# Altium PCB Copy of back.PcbDoc
Units mil, origin at the board's own origin, x right, y up, seen from the top; angles counter-clockwise.
Board outline 4535 x 3940 mil, 2 copper layers (Top Layer, Bottom Layer); 81 components, 61 nets, 303 pads, 75 vias.
Unrouted connection lines stored in the file: 5.
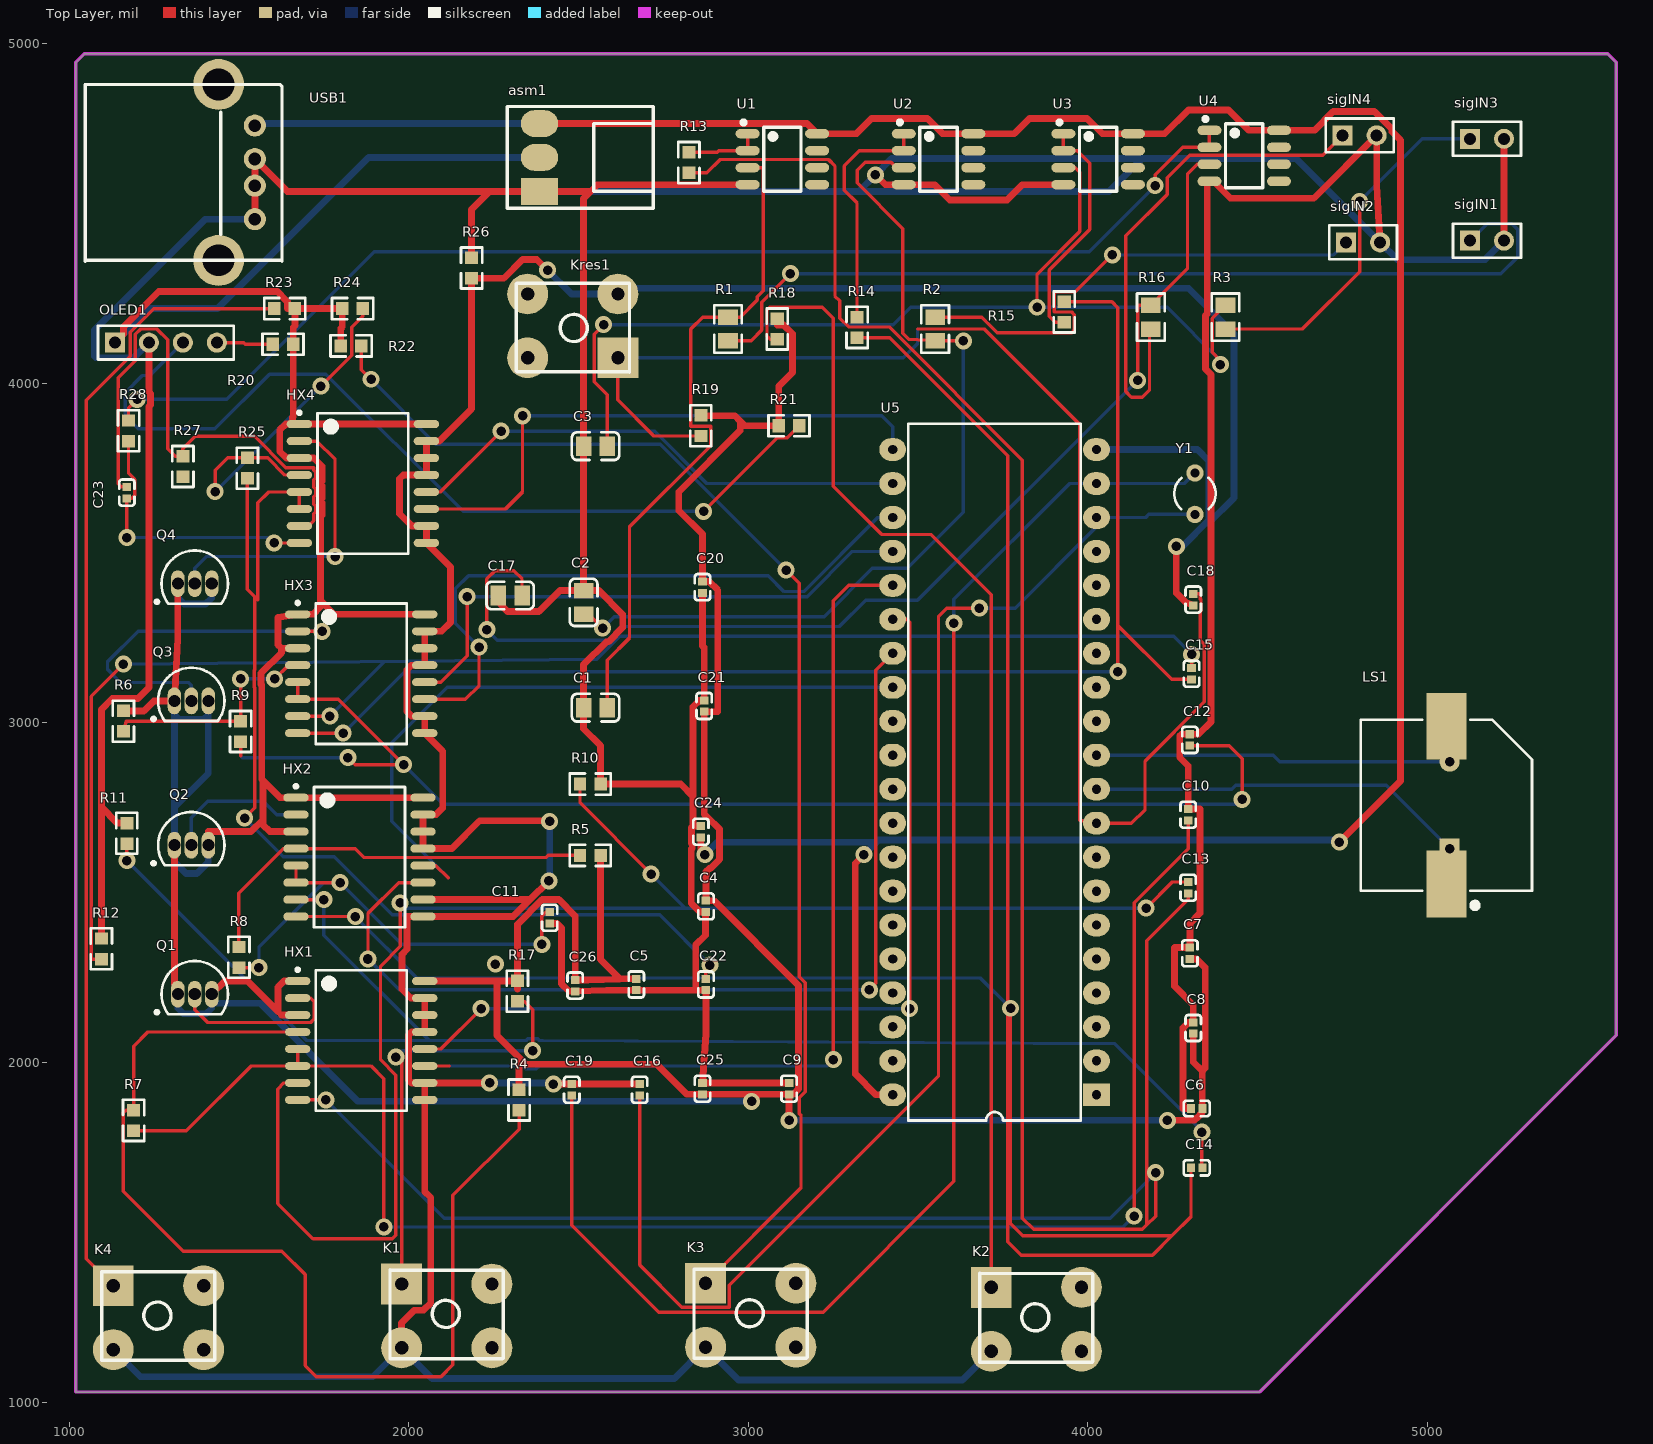
[diagram p0: Top Layer view]
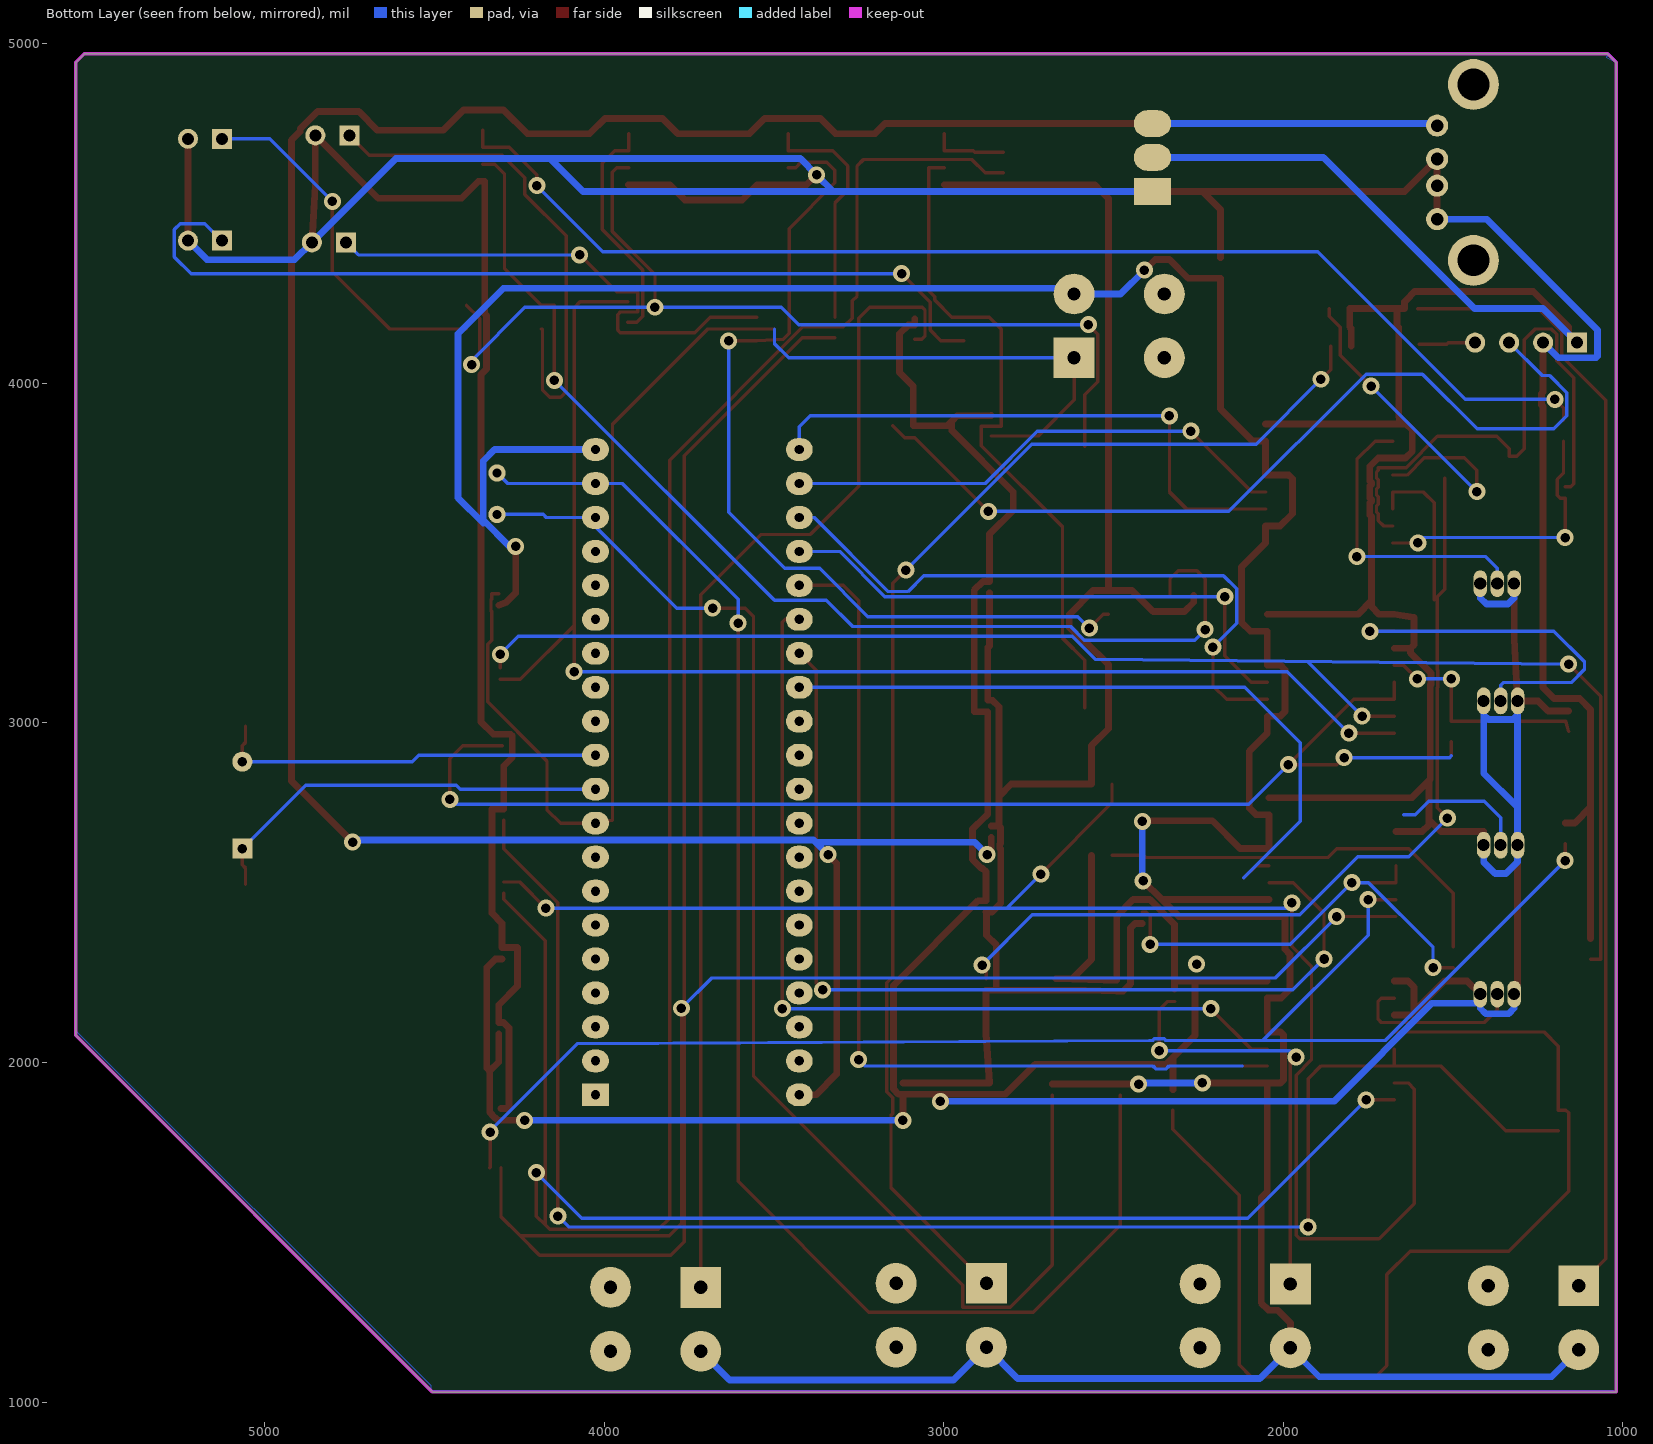
[diagram p1: Bottom Layer view, seen from below]

## Layer stack, top to bottom
Top Solder: solder mask 0.4, Solder Resist, Dk 3.5
Top Layer: signal copper 1.4
Dielectric 1: dielectric 12.6, FR-4, Dk 4.8
Bottom Layer: signal copper 1.4
Bottom Solder: solder mask 0.4, Solder Resist, Dk 3.5

## Board outline
1020,1030 1020,4945 1045,4970 5530,4970 5555,4945 5555,2080 4505,1030

## Design rules (kind name [scope] priority, off if disabled: settings)
Clearance [All] p1: gap=5 ignorepadtopadclearanceinfootprint=TRUE
MinimumSolderMaskSliver [All] p1 off: minsoldermaskwidth=10
PlaneConnect [All] p1: planeconnectstyle=Direct reliefexpansion=20 reliefentries=4 reliefconductorwidth=10 reliefairgap=10
PolygonConnect [All] p1: connectstyle=Direct reliefconductorwidth=10 reliefentries=4 polygonreliefangle="90 Angle" airgapwidth=10
RoutingVias [All] p1: holewidth=28 width=50 viastyle="Through Hole" minholewidth=28 minwidth=50 maxholewidth=28 maxwidth=50
SilkToSilkClearance [All] p1: silktosilkclearance=0
SilkToSolderMaskClearance [IsPad] p1: minsilkscreentomaskgap=0 clearancetoexposedcopper=TRUE
SolderMaskExpansion [All] p1: expansion=4
Width [All] p1: maxlimit=80 minlimit=10 preferedwidth=10 minimp=50.000000 maximp=50.000000 favimp=50.000000
26 further rules are at their usual default settings.

## Components (designator, comment, footprint, x,y, rotation, side; value= is the part's Value field where it differs from the comment)
asm1 "ASM1117" 1117PCB 2645,4565 r180 top
C1 "1uF (105) 10% 50V" 0805_C 2550.04,3045 r0 top
C2 "1uF (105) 10% 50V" 0805_C 2515,3354.96 r270 top
C3 "1uF (105) 10% 50V" 0805_C 2550.04,3815 r0 top
C4 "10uF (106) 20% 6.3V" 0402_C 2875,2460 r90 top
C5 "10uF (106) 20% 6.3V" 0402_C 2670,2230 r90 top
C6 "10uF (106) 20% 6.3V" 0402_C 4320,1865 r0 top
C7 "10uF (106) 20% 6.3V" 0402_C 4300,2321.73 r90 top
C8 "10uF (106) 20% 6.3V" 0402_C 4310,2101.73 r90 top
C9 "10uF (106) 20% 6.3V" 0402_C 3120,1923.27 r90 top
C10 "10uF (106) 20% 6.3V" 0402_C 4295,2730 r270 top
C11 "10uF (106) 20% 6.3V" 0402_C 2415,2426.54 r90 top
C12 "10uF (106) 20% 6.3V" 0402_C 4300,2950 r270 top
C13 "10uF (106) 20% 6.3V" 0402_C 4295,2515 r270 top
C14 "10uF (106) 20% 6.3V" 0402_C 4320,1690 r180 top
C15 "10uF (106) 20% 6.3V" 0402_C 4305,3145 r270 top
C16 "10uF (106) 20% 6.3V" 0402_C 2680,1920 r90 top
C17 "1uF (105) 10% 50V" 0805_C 2298.62,3375.31 r0 top
C18 "10uF (106) 20% 6.3V" 0402_C 4310,3363.27 r90 top
C19 "10uF (106) 20% 6.3V" 0402_C 2480,1920 r90 top
C20 "10uF (106) 20% 6.3V" 0402_C 2865,3400 r90 top
C21 "10uF (106) 20% 6.3V" 0402_C 2870,3050 r90 top
C22 "10uF (106) 20% 6.3V" 0402_C 2875,2230 r90 top
C23 "10uF (106) 20% 6.3V" 0402_C 1170,3678.27 r270 top
C24 "10uF (106) 20% 6.3V" 0402_C 2860,2680 r90 top
C25 "10uF (106) 20% 6.3V" 0402_C 2865,1923.27 r90 top
C26 "10uF (106) 20% 6.3V" 0402_C 2490,2226.73 r270 top
HX1 "hx711" HX711 1860,2065 r0 top
HX2 "hx711" HX711 1855,2605 r0 top
HX3 "hx711" HX711 1860,3145 r0 top
HX4 "hx711" HX711 1865,3705 r0 top
K1 "key" KEYPCB 2019,1365 r0 top
K2 "key" KEYPCB 3755,1355 r0 top
K3 "key" KEYPCB 2914,1367 r0 top
K4 "key" KEYPCB 1170,1360 r0 top
Kres1 "key" KEYPCB 2576,4058 r180 top
LS1 "Buzzer" ABSM-1574 5055.55,2525.67 r90 top
OLED1 "Header 4" HDR1X4 1135,4120 r0 top
Q1 "2N3906" TO-92A 1370,2201.54 r270 top
Q2 "2N3906" TO-92A 1360,2640 r270 top
Q3 "2N3906" TO-92A 1360,3065 r270 top
Q4 "2N3906" TO-92A 1370,3410 r270 top
R1 "15.8k" 0805_R 2940,4160.04 r90 top
R2 "15.8k" 0805_R 3550,4159.96 r270 top
R3 "15.8k" 0805_R 4405,4195 r90 top
R4 "10KΩ (1002) ±1%" 0603_R 2325,1889.68 r90 top
R5 "10KΩ (1002) ±1%" 0603_R 2534.68,2610 r0 top
R6 "10KΩ (1002) ±1%" 0603_R 1160,3005.32 r90 top
R7 "10KΩ (1002) ±1%" 0603_R 1190,1829.68 r90 top
R8 "10KΩ (1002) ±1%" 0603_R 1500,2310 r90 top
R9 "10KΩ (1002) ±1%" 0603_R 1505,2975 r90 top
R10 "1KΩ (1002) ±1%" 0603_R 2534.68,2820 r0 top
R11 "1KΩ (1002) ±1%" 0603_R 1170,2675 r90 top
R12 "1KΩ (1002) ±1%" 0603_R 1095,2335 r90 top
R13 "1KΩ (1002) ±1%" 0603_R 2825,4650 r90 top
R14 "1KΩ (1002) ±1%" 0603_R 3320,4164.68 r90 top
R15 "1KΩ (1002) ±1%" 0603_R 3930,4210 r270 top
R16 "15.8k" 0805_R 4185,4195 r90 top
R17 "10KΩ (1002) ±1%" 0603_R 2320,2210.31 r90 top
R18 "10KΩ (1002) ±1%" 0603_R 3085,4160 r90 top
R19 "10KΩ (1002) ±1%" 0603_R 2860,3875.31 r90 top
R20 "10KΩ (1002) ±1%" 0603_R 1629.69,4115 r180 top
R21 "10KΩ (1002) ±1%" 0603_R 3119.68,3875 r0 top
R22 "10KΩ (1002) ±1%" 0603_R 1830.32,4110 r180 top
R23 "10KΩ (1002) ±1%" 0603_R 1634.68,4220 r0 top
R24 "10KΩ (1002) ±1%" 0603_R 1834.69,4220 r180 top
R25 "10KΩ (1002) ±1%" 0603_R 1525,3750.31 r90 top
R26 "0Ω (0R0) ±1%" 0603_R 2185,4339.68 r90 top
R27 "1KΩ (1002) ±1%" 0603_R 1335,3755 r270 top
R28 "1KΩ (1002) ±1%" 0603_R 1175,3860.31 r90 top
sigIN1 "Header 2" HDR1X2 5125,4420 r0 top
sigIN2 "Header 2" HDR1X2 4760,4415 r0 top
sigIN3 "Header 2" HDR1X2 5125,4720 r0 top
sigIN4 "Header 2" HDR1X2 4750,4730 r0 top
U1 "TL072CDT" SOIC-8_150mil 3100,4660 r270 top
U2 "TL072CDT" SOIC-8_150mil 3560,4660 r270 top
U3 "TL072CDT" SOIC-8_150mil 4030,4660 r270 top
U4 "TL072CDT" SOIC-8_150mil 4460,4670 r270 top
U5 "89c52" DIP40 3725,2855 r90 top
USB1 "USBA" USB-A 1547,4759 r90 top
Y1 "XTAL" R38 4315,3675 r180 top

## Footprints (in the part's own frame and the unit in brackets; to place one, negate y for a bottom-side part, rotate by r counter-clockwise, add the part's x,y. Pads: shape width x height; smd on the part's side, far side on the other; paste and mask are expansions set on the pad)
0402_C [mm]
  rect 0.6x0.65 smd mask+0.051: 1(-0.425,0) 2(0.425,0)
  silkscreen extent -0.98,-0.58 0.98,0.58, body extent -0.48,-0.3 0.52,0.3, height 0.2
0603_R [mm]
  rect 0.93x0.98 smd: 1(-0.77,0) 2(0.77,0)
  silkscreen extent -1.53,-0.79 1.54,0.79, body extent -0.85,-0.4 0.85,0.4, height 0.56
0805_C [mm]
  rect 1.16x1.47 smd: 1(-0.89,0) 2(0.89,0)
  silkscreen extent -1.77,-1.04 1.77,1.04, body extent -1,-0.62 1,0.63, height 0.77
0805_R [mm]
  rect 1.16x1.47 smd: 1(-0.89,0) 2(0.89,0)
  silkscreen extent -1.77,-1.03 1.77,1.03, body extent -1,-0.62 1,0.63, height 0.49
1117PCB [mm]
  rect 2.8x2 all layers, no hole: 1(6.604,0)
  oval 2.8x2 all layers, no hole: 2(6.604,-2.54) 3(6.604,-5.08)
  silkscreen extent -1.91,-6.35 9.02,1.27
ABSM-1574 [mm] "Magnetic Transducer Buzzer"
  rect 5x3 smd: 1(0,0) 2(11.8,0)
  rect 1.5x1.5 hole 0.7: 1A(2.65,-0.24)
  round 1.5 hole 0.7: 2A(9.15,-0.24)
  silkscreen extent -1.83,-6.4 12.3,6.4
DIP40 [mm]
  rect 1.7x2 hole 0.7: 1(-24.13,-7.62)
  oval 1.7x2 hole 0.7: 2(-21.59,-7.62) 3(-19.05,-7.62) 4(-16.51,-7.62) 5(-13.97,-7.62) 6(-11.43,-7.62) 7(-8.89,-7.62) 8(-6.35,-7.62) 9(-3.81,-7.62) 10(-1.27,-7.62) 11(1.27,-7.62) 12(3.81,-7.62) 13(6.35,-7.62) 14(8.89,-7.62) 15(11.43,-7.62) 16(13.97,-7.62) 17(16.51,-7.62) 18(19.05,-7.62) 19(21.59,-7.62) 20(24.13,-7.62) 21(24.13,7.62) 22(21.59,7.62) 23(19.05,7.62) 24(16.51,7.62) 25(13.97,7.62) 26(11.43,7.62) 27(8.89,7.62) 28(6.35,7.62) 29(3.81,7.62) 30(1.27,7.62) 31(-1.27,7.62) 32(-3.81,7.62) 33(-6.35,7.62) 34(-8.89,7.62) 35(-11.43,7.62) 36(-13.97,7.62) 37(-16.51,7.62) 38(-19.05,7.62) 39(-21.59,7.62) 40(-24.13,7.62)
  silkscreen extent -26.05,-6.45 26.05,6.45
HDR1X2 [mm] "Connector; Header; 2 Position"
  rect 1.5x1.5 hole 0.9: 1(0,0)
  round 1.5 hole 0.9: 2(2.54,0)
  silkscreen extent -1.27,-1.27 3.81,1.27
HDR1X4 [mm] "Connector; Header; 4 Position"
  rect 1.5x1.5 hole 0.9: 1(0,0)
  round 1.5 hole 0.9: 2(2.54,0) 3(5.08,0) 4(7.62,0)
  silkscreen extent -1.27,-1.27 8.89,1.27
HX711 [mm] "SOP, 16-Leads, Body 10.30x7.50mm, Pitch 1.27mm, IPC Medium Density"
  oval 1.9x0.6 smd: 1(-4.75,4.445) 2(-4.75,3.175) 3(-4.75,1.905) 4(-4.75,0.635) 5(-4.75,-0.635) 6(-4.75,-1.905) 7(-4.75,-3.175) 8(-4.75,-4.445) 9(4.75,-4.445) 10(4.75,-3.175) 11(4.75,-1.905) 12(4.75,-0.635) 13(4.75,0.635) 14(4.75,1.905) 15(4.75,3.175) 16(4.75,4.445)
  silkscreen extent -4.87,-5.25 3.4,5.42, body extent -3.8,-5.25 3.8,5.25, height 2.65
KEYPCB [mil]
  rect 120x120 hole 39.37: 1(-40,-17)
  round 120 hole 39.37: 2(-40,-205) ""(226,-205) ""(226,-17)
  silkscreen extent -74,-237 259,25
R38 [mm] "Crystal, Thru-Hole; 2 Leads; Body 3.1 x 8.2 mm (Dia.xH)"
  round 1.3 hole 0.7: 1(0,1.55) 2(0,-1.55)
  silkscreen extent -1.55,-1.19 1.55,1.17
SOIC-8_150mil [mm]
  oval 0.7x1.8 smd: 1(-1.905,-2.6) 2(-0.635,-2.6) 3(0.635,-2.6) 4(1.905,-2.6) 5(1.905,2.6) 6(0.635,2.6) 7(-0.635,2.6) 8(-1.905,2.6)
  silkscreen extent -2.9,-3.05 2.4,1.4
TO-92A [mm] "TO, Flat Index; 3 In-Line, Axial Leads; Body Dia. 4.5mm; Leads 0.51 x 0.48 mm (max)"
  oval 2x1 hole 0.9: 1(0,-1.27) 2(0,0) 3(0,1.27)
  silkscreen extent -2.48,-2.95 1.5,2.48, body extent -2.48,-2.5 1.5,2.5, height 6.86
USB-A [mil]
  round 65 hole 37: 1(0,0) 2(-98.5,0) 3(-177,0) 4(-275.6,0)
  round 150 hole 93: 5(121,107) 6(-397,107)
  silkscreen extent -400,-80 121,500

## Part data
asm1: library part 1117
C1 C2 C3 C17: library part "0805 1uF (105) 10% 50V", "贴片电容", Package=0805, SuppliersPartNumber=C28323, ComponentLink1Description=¹©Ó, ComponentLink1URL=http://www.szlcsc.com/product/details_29074.html, Supplier=LC
C4 C5 C6 C7 C8 C9 C10 C11 C12 C13 C14 C15 C16 C18 C19 C20 C21 C22 C23 C24 C25 C26: library part "0402 10uF (106) 20% 6.3V", "贴片电容", Package=0402, SuppliersPartNumber=C15525, ComponentLink1Description=¹©Ó, ComponentLink1URL=http://www.szlcsc.com/product/details_16204.html, Supplier=LC
LS1: "Magnetic Transducer Buzzer", ComponentLink1Description="Manufacturer Link", ComponentLink1URL=http://www.megastar.com/linecard/buzzmode/index.php, DatasheetVersion=17-Dec-2003, LatestRevisionDate=17-Dec-2003, LatestRevisionNote="Schematic revised, PCB Footprint replaced.", PackageDescription="Magnetic Transducer Buzzer", PackageReference=ABSM-1574, Published=24-Mar-1999, Publisher="Altium Limited"
OLED1: "Header, 4-Pin", LatestRevisionDate=17-Jul-2002, LatestRevisionNote="Re-released for DXP Platform.", Publisher="Altium Limited"
Q1 Q2 Q3 Q4: "PNP General Purpose Amplifier", ComponentLink1Description="Manufacturer Link", ComponentLink1URL=http://www.fairchildsemi.com/, ComponentLink2Description=Datasheet, ComponentLink2URL=http://www.fairchildsemi.com/ds/2N%2F2N3906.pdf, DatasheetVersion=1997, LatestRevisionDate=15-Jan-2003, LatestRevisionNote="PCB Footprint 'BCY-W3/D4.7' replaced", PackageDescription="TO, Flat Index; 3 In-Line, Axial Leads; Body Dia. 4.5mm; Leads 0.51 x 0.48 mm (max)", PackageReference=TO-92A, PackageVersion=Sep-1998, Published=8-Jun-2000, Publisher="Altium Limited"
R1 R2 R3 R16: library part "0805 330KΩ (3303) 1%", "贴片电阻", Package=0805, SuppliersPartNumber=C17629, ComponentLink1Description=¹©Ó, ComponentLink1URL=http://www.szlcsc.com/product/details_18317.html, Supplier=LC
R4 R5 R6 R7 R8 R9 R10 R11 R12 R13 R14 R15 R17 R18 R19 R20 R21 R22 R23 R24 R25 R27 R28: library part "0603 10KΩ (1002) 1%", "贴片电阻", Package=0603, SuppliersPartNumber=C25804, ComponentLink1Description=¹©Ó, ComponentLink1URL=http://www.szlcsc.com/product/details_26547.html, Supplier=LC
R26: library part "0603 0Ω (0R0) 1%", "贴片电阻", Package=0603, SuppliersPartNumber=C21189, ComponentLink1Description=¹©Ó, ComponentLink1URL=http://www.szlcsc.com/product/details_21903.html, Supplier=LC
sigIN1 sigIN2 sigIN3 sigIN4: "Header, 2-Pin", LatestRevisionDate=17-Jul-2002, LatestRevisionNote="Re-released for DXP Platform.", Publisher="Altium Limited"
U1 U2 U3 U4: library part TL072CDT_[C6961], "运放", Package=SOIC-8_150mil, SuppliersPartNumber=C6961, ComponentLink1Description=¹©Ó, ComponentLink1URL=http://www.szlcsc.com/product/details_7433.html, Supplier=LC
U5: "AT89C52"
Y1: "Crystal Oscillator", LatestRevisionDate=17-Jul-2002, LatestRevisionNote="Re-released for DXP Platform.", PackageDescription="Crystal, Thru-Hole; 2 Leads; Body 3.1 x 8.2 mm (Dia.xH)", PackageReference=R38, Published=8-Jun-2000, Publisher="Altium Limited"

## Via types
v1: diameter 50, hole 28, Top Layer to Bottom Layer, 75 vias

## Nets (pads, with @x,y where several pads share a name; then routed paths per layer and width w, separated by ;. In a path a pad name is that pad's centre, name@x,y a point inside that pad or via, vN(x,y) a via of type N, cw(c..) or ccw(c..) an arc to the next point about the centre after c; other vN are vias at no path point)
+3V3: asm1.2 C4.2 C5.2 C6.2 C7.1 C8.1 C9.1 C20.2 C21.1 C25.1 C26.1 HX1.1 HX1.3 HX1.16 HX2.1 HX2.3 HX2.16 HX3.1 HX3.3 HX3.16 HX4.1 HX4.3 HX4.16 OLED1.1 Q1.1 Q1.3 Q2.1 Q2.3 Q3.1 Q3.3 Q4.1 Q4.3 R4.2 R5.2 R6.2 R17.2 R18.2 R19.2 R20.1 R21.1 R22.2 R23.2 R24.2 | length 17897.8
  Top Layer w20: OLED1.1 1160,4145 1160,4166 1264,4270 1613.18,4270 1637.68,4245.5 1637.68,4245.32 1643,4240 1643,4220 R23.2 ; R6.2 1220,3035.63 1249.37,3065 Q3.1 1320,3248 Q4.1 ; Q2.1 1310,2231 1320,2221 Q1.1 ; Q2.3 1410,2680 1536,2680 1571,2715 ; Q1.3 1458.46,2240 1525,2240 1615,2150 1615,2222 1633,2240 HX1.1 ; 1625,2140 HX1.3 ; HX2.3 1591,2680 1571,2700 1571,2715 ; HX3.3 1625,3220 ; R22.2 1800,4162 1804.37,4166.37 R24.2 R23.2 ; HX2.16 HX2.1 1621,2780 1571,2830 ; HX1.16 2183,2240 2183.63,2240.63 2260,2240.63 ; HX3.16 1780.39,3320 1740.39,3360 ; HX4.16 HX4.1 HX4.1@1658,3880 ; 2320,2217 R17.2 ; R4.2 2325,2015 ; R5.2 2565,2304 2622.27,2246.73 C5.2 2528,2243.46 C26.1 2490,2432 2442,2480 2392.96,2480 2320,2407.04 R17.2 ; R19.2 2960,3904.63 2976,3888.63 ; C21.1 C21.1@2870,3033 ; v1(3009.93,1886) 3030.46,1906.54 ; R18.2 3085,4172 3104,4172 3130,4146 3130,4031.63 3089.37,3991 R21.1 2989.63,3875 2976,3888.63 ; v1(3120,1830) C9.1 ; v1(4234,1830) 4312.69,1830 4319.9,1837.2 4321.29,1837.2 4330.08,1845.99 4330.08,1847.39 4336.73,1854.04 C6.2 4336.73,1975 ; C7.1 4320,2305 4345,2280 4345,1983.27 4336.73,1975 ; C8.1 4310,2001.73 4336.73,1975 ; 1571,2715 1571,2830 ; 1571,2830 1567,2834 1567,3111.43 1565,3113.43 1565,3146.57 1625,3206.57 1625,3220 ; 1625,3220 1615,3230 1615,3310.33 HX3.1 1718,3320 1740.39,3342.39 1740.39,3360 ; HX4.1@1658,3880 1658,3900 1660,3902 R20.1 1660,4165 1665,4170 R23.2 ; HX4.1@1658,3880 1638,3880 1620,3862 1620,3800 1640,3780 HX4.3 1720.39,3780 1745.39,3755 1745.39,3712.68 1740.39,3707.68 1740.39,3702.32 1745.39,3697.32 1745.39,3662.68 1740.39,3657.68 1740.39,3652.32 1745.39,3647.32 1745.39,3612.68 1740.39,3607.68 1740.39,3360 ; 2260,2240.63 R17.2 ; 2260,2240.63 2260,2080 2325,2015 ; 2325,2015 2345,1995 2730.54,1995 2819,1906.54 C25.1 3030.46,1906.54 ; C21.1@2870,3033 2910,3033 2910,3391 2884.27,3416.73 C20.2 2865,3556 2795,3626 2795,3680.37 2976,3861.37 2976,3888.63 ; C21.1@2870,3033 2870,2732 2878.46,2723.54 2879.01,2723.54 2915,2687.55 2915,2598.43 2888.57,2572 2885,2572 2875,2562 C4.2 2898.27,2476.73 3147.8,2227.2 3147.8,1921.98 3132.36,1906.54 C9.1 ; 3030.46,1906.54 C9.1
  Bottom Layer w20: OLED1.1 1235,4220 1437,4220 1882,4665 asm1.2 ; Q3.1 1310,3024 ; Q1.1 1320,2160 1336,2144 1404,2144 1420,2160 Q1.3@1420,2175 ; Q4.1 1320,3368 1338,3350 1402,3350 1420,3368 Q4.3 ; Q2.3 1410,2591 1376,2557 1344,2557 1310,2591 Q2.1 1310,2752 ; Q3.3 1410,3024 ; Q1.3 Q1.3@1420,2175 ; v1(3009.93,1886) 1850.72,1886 1561.72,2175 Q1.3@1420,2175 ; v1(3120,1830) v1(4234,1830) ; 1310,2752 1310,3024 ; 1310,2752 1410,2852 1410,3024 ; 1310,3024 1324,3010 1396,3010 1410,3024
+5V: asm1.3 C24.1 U1.8 U2.8 U3.8 U4.8 U5.40 USB1.1 | length 8508
  Top Layer w20: asm1.3 3172.36,4765 U1.8 3318,4735 3363,4780 3527,4780 3572,4735 U2.8 3783,4735 3828,4780 3997,4780 4042,4735 U3.8 4226,4735 4296,4805 4414,4805 4474,4745 U4.8 4667,4745 4722,4800 4842.97,4800 4894.53,4748.44 4894.53,4741.47 4920,4716 4920,2829 v1(4740,2649) ; C24.1 2860,2624 v1(2872,2612) ; v1(3340,2612) 3315,2587 3315,1966 3376,1905 U5.40
  Bottom Layer w20: USB1.1 1553,4765 asm1.3 ; v1(2872,2612) 2909,2649 3377,2649 ; v1(3340,2612) 3377,2649 ; v1(4740,2649) 4734,2655 3383,2655 3377,2649
BEEP1: LS1.1 LS1.1A U5.10 | length 1230.3
  Top Layer w10: LS1.1 5055.55,2573 5065,2582.45 LS1.1A
  Bottom Layer w10: U5.10 4423.43,2805 4435,2816.57 4878.43,2816.57 LS1.1A
BEEP2: LS1.2 LS1.2A U5.11 | length 1156.2
  Top Layer w10: LS1.2 5055.55,2942.45 5065,2933 LS1.2A
  Bottom Layer w10: U5.11 4545,2905 4564.09,2885.91 LS1.2A
DGND: C16.2 C18.1 C19.2 HX1.9 HX1.10 HX1.13 HX1.14 HX1.15 HX2.9 HX2.10 HX2.13 HX2.14 HX2.15 HX3.9 HX3.10 HX3.13 HX3.14 HX3.15 HX4.9 HX4.10 HX4.13 HX4.14 HX4.15 K1.2 K2.2 K3.2 K4.2 Kres1.2 R26.1 U5.20 | length 12213.6
  Top Layer w20: K1.2 1979,1233 2017,1271 2043.21,1271 2065,1292.79 2065,1602 2047.01,1619.99 HX1.9 HX1.10 ; HX2.10 2357.6,2480 ; v1(2238,1940) HX1.10 ; v1(2409,4333) 2377,4365 2335.63,4365 2280,4309.37 R26.1 2185,3925 2090,3830 HX4.15 HX4.14 HX4.13 1984,3730 1973,3719 1973,3616 2009,3580 HX4.10 HX4.9 2123,3459.01 2123,3296 2097,3270 HX3.15 HX3.14 HX3.13 2008,3170 1994.61,3156.61 1994.61,3108.89 1995,3108.5 1995,3081.5 1994.61,3081.11 1994.61,3033.39 2008,3020 HX3.10 HX3.9 2100,2917.01 2100,2750 2080,2730 HX2.15 HX2.14 HX2.13 2127,2630 2209,2712 2413,2712 v1(2415,2710) ; v1(2412.6,2535) 2357.6,2480 ; v1(2425.73,1936.73) C19.2 C16.2 ; v1(4260,3520) 4260,3382.54 4287,3355.54 C18.1 ; HX1.10 2008,1940 1999,1949 1999,2081 2008,2090 HX1.13 HX1.14 HX1.15 2006,2190 1980,2216 1980,2318.72 1995,2333.72 1995,2430 HX2.9 2307.6,2430 2357.6,2480
  Bottom Layer w10: v1(2412.6,2535) v1@2415,2537.4 ; v1@2422.46,1940 v1(2425.73,1936.73)
  Bottom Layer w20: K4.2 1210,1075 1894,1075 K1.2 2069,1070 2782,1070 K3.2 2971,1065 3630,1065 K2.2 ; v1(2238,1940) v1@2422.46,1940 ; v1(2409,4333) 2479,4263 Kres1.2 2633,4280 4296,4280 4430,4146 4430,3663 4355.59,3588.59 ; v1@2415,2537.4 v1(2415,2710) ; U5.20 4322,3805 4355.59,3771.41 4355.59,3597.16 4278.43,3520 v1(4260,3520)
DOUT: HX2.12 U5.28 | length 2098.2
  Top Layer w10: HX2.12 2080,2580 2116,2544
  Bottom Layer w10: 2116,2544 1950,2710 1950,2942 2113,3105 U5.28
DOUT1: HX1.12 U5.26 | length 2668
  Top Layer w10: HX1.12 2094,2040 v1(2213,2159) ; U5.26 3466,3305 3475,3296 v1(3475,2159)
  Bottom Layer w10: v1(2213,2159) v1(3475,2159)
DOUT2: HX3.12 U5.24 | length 1639.4
  Top Layer w10: HX3.12 2094,3120 2172,3198 v1(2172,3372)
  Bottom Layer w10: v1(2172,3372) 3172.84,3372 3305.84,3505 U5.24
DOUT3: HX4.12 U5.22 | length 1510.9
  Top Layer w10: HX4.12 2093,3680 v1(2272,3859)
  Bottom Layer w10: v1(2272,3859) 2724,3859 2878,3705 U5.22
GND: asm1.1 C1.1 C2.1 C3.1 C4.1 C5.1 C6.1 C7.2 C8.2 C9.2 C10.1 C11.1 C12.1 C17.1 C20.1 C21.2 C22.1 C24.2 C25.2 C26.2 OLED1.2 R10.2 R11.2 R12.2 R26.2 sigIN1.2 sigIN2.2 sigIN3.2 sigIN4.2 U1.4 U2.4 U3.4 U4.4 USB1.2 USB1.3 USB1.4 | length 18320.7
  Top Layer w20: R12.2 1095,2752 ; R11.2 1141.68,2705.32 1095,2752 ; OLED1.2 1235,3974.57 1240,3969.57 1240,3936.43 1235,3931.43 1235,3104 1203,3072 1127,3072 1095,3040 1095,2752 ; USB1.4 USB1.3 USB1.2 1642.5,4565 2238,4565 ; R26.2 2185,4512 2238,4565 ; C17.1 2263.58,3355.42 2291,3328 2383,3328 2445,3390 C2.1 ; C11.1 2436.2,2409.8 2450,2396 2450,2232 2472,2210 C26.2 2583.27,2213.27 C5.1 2845,2213.27 2845,2346 2874,2375 C4.1@2874,2443.27 ; 2852,2213.27 C22.1 2875,2086 C25.2 C9.2 ; C24.2 2837,2696.73 ; C20.1 2865,3227 2870,3222 C21.2 2856,3066.73 2837,3047.73 2837,2784 ; C4.1 C4.1@2874,2443.27 ; U1.4 2556,4585 2536,4565 ; v1(3374,4614) 3403,4585 U2.4 3548,4585 3593,4540 3762,4540 3807,4585 U3.4 ; C6.1 4280,1865 4280,2102.46 4296,2118.46 C8.2 4310,2170 4255,2225 4255,2338.27 4255.2,2338.46 C7.2 4300,2410 4330,2440 4330,2746.73 C10.1 4295,2874 4270,2899 4270,2961.72 4275.02,2966.73 C12.1 4325.73,2966.73 4362.18,3003.18 4362.18,4026.25 4346,4042.43 4346,4199.32 4351,4204.32 4351,4595 U4.4 4370,4595 4420,4545 4665,4545 sigIN4.2 4850,4582 sigIN2.2 ; sigIN1.2 sigIN3.2 ; 2238,4565 asm1.1 2536,4565 ; C2.1 2560,3390 2630,3320 2630,3281.43 2587.57,3239 2581.94,3239 2515,3172.06 C1.1 2515,2983 2565,2933 R10.2 2801,2820 2837,2784 ; C2.1 C3.1 2515,4544 2536,4565 ; 2837,2696.73 2832.2,2691.94 2832.2,2645.24 2835,2642.45 2835,2631.57 2832,2628.57 2832,2469 2857.73,2443.27 C4.1@2874,2443.27 ; 2837,2696.73 2837,2784
  Bottom Layer w20: OLED1.2 1190.47,4075.47 1079.53,4075.47 1075,4080 1075,4157 1401.4,4483.4 USB1.4 ; asm1.1 3325,4565 ; sigIN1.2 5169,4364 4911,4364 sigIN2.2 4613,4662 4159,4662 ; 3325,4565 4062,4565 4159,4662 ; 3325,4565 v1(3374,4614) 3422,4662 4159,4662
K1: U5.1
K1_PA4: K4.1 R23.1 | length 3347.5
  Top Layer w10: K4.1 1050,1423 1050,3950 1180,4080 1180,4150.21 1249.79,4220 R23.1
K2: U5.2
K2_PA5: K3.1 R22.1 | length 3813.9
  Top Layer w10: R22.1 1860.63,4040.37 v1(1889,4012) ; K3.1 3155,1631 3155,1844.5 3150,1849.5 3150,1895.9 3167.8,1913.69 3167.8,2235.49 3150,2253.28 3150,3411 v1(3111,3450)
  Bottom Layer w10: v1(1889,4012) 2080,3821 2740,3821 v1(3111,3450)
K3: U5.3
K3_PA8: K2.1 R18.1 | length 3454.2
  Top Layer w10: R18.1 3064,4129.69 3055,4138.69 3055,4216 3063,4224 3218,4224 3250,4192 3250,3697 3392,3555 3537,3555 3715,3377 K2.1
K4: U5.4
K4_PA15: K1.1 R17.1 | length 1268.5
  Top Layer w10: v1(1962,2016) 1979,2013 K1.1 ; R17.1 2340,2180 2365,2155 v1(2365,2035)
  Bottom Layer w10: v1(1962,2016) 1981,2035 v1(2365,2035)
NetC1_2: C1.2 R1.2 U1.3 | length 1975.3
  Top Layer w10: C1.2 2585.08,3185.22 2650,3250.14 2650,3577.4 2889.29,3816.69 2889.29,3874 2830,3874 2830,4160 2865.08,4195.08 R1.2 2976,4195.08 3026.25,4245.33 3026.25,4255.14 3044,4272.88 3044,4635 U1.3
NetC2_2: C2.2 R2.2 U2.3 | length 2655.7
  Top Layer w10: C2.2 2530.08,3319.92 v1(2571,3279) ; U2.3 3436,4635 3420,4651 3344,4651 3320.49,4627.49 3320.49,4590.01 3455,4455.5 3455,4147.33 3472,4130.33 R2.2 v1(3633,4124.92)
  Bottom Layer w10: v1(2571,3279) 2605,3313 3223,3313 3365,3455 3468,3455 3633,3620 v1(3633,4124.92)
NetC3_2: C3.2 R3.2 U3.3 | length 3005
  Top Layer w10: v1(2574,4173) 2546,4145 2546,4005 2585.08,3965.92 C3.2 ; v1(3850,4224) 3850,4321 3976,4447 3976,4622 3963,4635 U3.3 ; v1(4390,4055) 4390,4067 4366,4091 4366,4191.04 R3.2
  Bottom Layer w10: v1(2574,4173) 3426.94,4173 3477.94,4224 3753,4224 v1(3850,4224) 4233,4224 4390,4067 v1(4390,4055)
NetC10_2: C10.2 HX1.5 HX1.6 R7.1 | length 4771.1
  Top Layer w10: R7.1 1345.37,1799.37 1536,1990 HX1.6 ; HX1.5 HX1.6 ; v1(1927,1516) 1927,1952 1889,1990 HX1.6 ; v1(4136,1548) 4136,2471 4295,2630 C10.2
  Bottom Layer w10: v1(1927,1516) 4104,1516 v1(4136,1548)
NetC11_2: C11.2 HX2.5 HX2.6 R8.1 | length 1397.9
  Top Layer w10: R8.1 v1(1559,2279.69) ; HX2.5 HX2.6 v1(1798,2530) ; v1(2392.2,2348) 2392.2,2431.62 2403.86,2443.27 C11.2
  Bottom Layer w10: v1(1559,2279.69) 1559,2340 1749,2530 v1(1798,2530) 1980,2348 v1(2392.2,2348)
NetC12_2: C12.2 HX3.5 HX3.6 R9.1 | length 3787.3
  Top Layer w10: 1505,2903 R9.1 ; HX3.5 HX3.6 1792,3070 v1(1985,2877) 1842,2877 v1(1821,2898) ; C12.2 4416,2933.27 4454,2895.27 v1(4454,2775)
  Bottom Layer w10: 1505,2903 1510,2898 v1(1821,2898) ; v1(1985,2877) 2101,2761 4440,2761 v1(4454,2775)
NetC13_1: C13.1 HX1.7 R10.1 | length 4671.6
  Top Layer w10: HX1.7 1632,1940 1614,1922 1614,1585 1718,1481 1952,1481 1962,1491 1962,1963 1917,2008 1917,2284 1975,2342 v1(1975,2470) ; R10.1 2504.37,2764.63 v1(2714,2555) ; v1(4171,2455) 4247.73,2531.73 C13.1
  Bottom Layer w10: v1(1975,2470) 1990,2455 2814,2455 ; v1(2714,2555) 2814,2455 ; v1(4171,2455) 2814,2455
NetC13_2: C13.2 HX1.8 R13.1 | length 8153.4
  Top Layer w10: HX1.8 v1(1756,1890) ; R13.1 2877.69,4619.69 2917,4659 3236,4659 3255,4640 3255,4257 3269,4243 3269,4192 3295,4166 3415.11,4166 3807,3774.11 3807,1542 3840,1509 4160,1509 4173,1522 ; v1(4199,1676) 4199,1548 4173,1522 ; C13.2 4295,2481 4173,2359 4173,1522
  Bottom Layer w10: v1(1756,1890) 2104,1542 4065,1542 v1(4199,1676)
NetC14_1: C14.1 HX2.7 R11.1 | length 4279.6
  Top Layer w10: v1(1170,2595) R11.1 ; HX2.7 v1(1750,2480) ; v1(4335,1795) 4335,1691.73 C14.1
  Bottom Layer w10: v1(1170,2595) 1699.96,2065.04 2059.96,2065.04 ; v1(1750,2480) 1750,2375 2059.96,2065.04 ; v1(4335,1795) 4335,1799.2 4079.2,2055 2395,2065.04 2384.46,2065.04 2379.5,2070 2350.5,2070 2345.54,2065.04 2059.96,2065.04
NetC14_2: C14.2 HX2.8 R14.1 | length 6988.7
  Top Layer w10: HX2.8 v1(1843,2430) ; R14.1 3416.63,4134.37 3764,3787 3764,1472 3803,1433 4190,1433 4247,1490 ; v1(3772,2160) 3772,1526 3808,1490 4247,1490 ; C14.2 4303.27,1546.27 4247,1490
  Bottom Layer w10: v1(1843,2430) 2024,2249 3683,2249 v1(3772,2160)
NetC15_1: C15.1 HX3.7 R12.1 | length 5120.2
  Top Layer w10: R12.1 1065,2304.69 1065,3078 v1(1160,3173) ; HX3.7 v1(1768,3020) ; C15.1 v1(4305,3202)
  Bottom Layer w10: v1(1160,3173) 2553.57,3187.57 ; v1(1768,3020) 1929.04,3181.04 2553.57,3187.57 ; v1(4305,3202) 4252,3255 2621,3255 2553.57,3187.57
NetC15_2: C15.2 HX3.8 R15.1 | length 4009.9
  Top Layer w10: HX3.8 v1(1807,2970) ; R15.1 4070.69,4240.31 4088,4223 4088,3287 ; v1(4088,3151) 4088,3287 ; C15.2 4246.73,3128.27 4088,3287
  Bottom Layer w10: v1(1807,2970) 1988,3151 v1(4088,3151)
NetC17_2: C17.2 R16.2 U4.3 | length 3334.3
  Top Layer w10: v1(2230,3275) 2230,3424 2254,3448 2309.66,3448 2333.66,3424 C17.2 ; v1(4146,4009) 4146,4230.04 R16.2 4292.89,4337.93 4292.89,4615.89 4322,4645 U4.3
  Bottom Layer w10: v1(2230,3275) 2261,3244 2586,3244 2626,3284 3268,3284 3345,3361 3498,3361 v1(4146,4009)
NetC22_2: C22.2 HX4.5 HX4.6 R25.1 | length 3088.4
  Top Layer w10: v1(1517,2720) 1547,2750 1547,3103.15 1545,3105.15 1545,3154.85 1547,3156.85 1547,3371.59 1525,3393.59 R25.1 ; 1555.59,3363 1555.59,3648 1587.59,3680 HX4.5 HX4.6 ; C22.2 2875,2275 v1(2887,2287)
  Bottom Layer w10: v1(1517,2720) 1631,2606 1781,2606 1952,2435 2739,2435 v1(2887,2287)
NetC23_1: C23.1 HX4.7 R27.1 | length 1657.8
  Top Layer w10: C23.1 1154,3695 1145,3704 1145,4017 1195,4067 1195,4144 1211,4160 1258,4160 1290,4128 1290,3807.31 1312,3785.31 R27.1 1335,3808 1371,3844 1546,3844 1638.19,3751.81 1720,3751.81 1720,3744.43 1725.39,3739.03 1725.39,3720.97 1720,3715.57 1720,3694.43 1725.39,3689.03 1725.39,3670.97 1720,3665.57 1720,3644.43 1725.39,3639.03 1725.39,3620.97 1720,3615.57 1720,3596 1704,3580 HX4.7
NetC23_2: C23.2 HX4.8 R28.1 | length 823.8
  Top Layer w10: v1(1170,3546) C23.2 1184,3661.54 1193,3670.54 1193,3717 1175,3735 R28.1 ; v1(1604,3530) HX4.8
  Bottom Layer w10: v1(1170,3546) 1588,3546 v1(1604,3530)
NetHX1_2: HX1.2 Q1.2 | length 521.7
  Top Layer w10: Q1.2 1370,2156 1408,2118 1712,2118 1721,2127 1721,2181 1712,2190 HX1.2
NetHX1_4: HX1.4 R4.1 R7.2 | length 3150.5
  Top Layer w10: HX1.4 1232,2090 1190,2048 R7.2 1168,1860 1160,1852 1160,1621 1336,1445 1626,1445 1695,1376 1695,1108 1728,1075 2095,1075 2130,1110 2130,1609 2325,1804 R4.1
NetHX2_2: HX2.2 Q2.2 | length 402
  Bottom Layer w10: Q2.2 1360,2721 1408,2769 1572,2769 1611,2730 1645,2730
NetHX2_4: HX2.4 R5.1 R8.2 | length 1230.6
  Top Layer w10: R8.2 1500,2499 1631,2630 HX2.4 1842,2630 1868,2604 2405.19,2604 2411.19,2610 R5.1
NetHX3_2: HX3.2 Q3.2 | length 1075.8
  Top Layer w10: HX3.2 v1(1745,3270)
  Bottom Layer w10: Q3.2 1360,3111 1352,3119 1152,3119 1113,3158 1113,3180 1203,3270 v1(1745,3270)
NetHX3_4: HX3.4 R6.1 R9.2 | length 677.6
  Top Layer w10: R6.1 1168,3005.32 R9.2 v1(1505,3130) ; v1(1605,3130) 1606,3130 1646,3170 HX3.4
  Bottom Layer w10: v1(1505,3130) v1(1605,3130)
NetHX4_2: HX4.2 Q4.2 | length 886.5
  Top Layer w10: HX4.2 1729,3830 1783,3776 v1(1783,3490)
  Bottom Layer w10: Q4.2 1370,3456 1404,3490 v1(1783,3490)
NetHX4_4: HX4.4 R24.1 R25.2 | length 1066.3
  Top Layer w10: v1(1430,3681) 1430,3744 1466.63,3780.63 R25.2 1584.96,3780.63 1635.59,3730 HX4.4 ; v1(1741,3992) 1832,4083 1832,4165 1865,4198 R24.1
  Bottom Layer w10: v1(1430,3681) v1(1741,3992)
NetOLED1_3: OLED1.3 R21.2 | length 2638.5
  Top Layer w10: v1(2868,3623) 3085,3840 3115,3840 R21.2
  Bottom Layer w10: OLED1.3 1238,4023 1216,4023 1165,3972 1165,3904 1203,3866 1429,3866 1590,4027 1756,4027 2160,3623 v1(2868,3623)
NetOLED1_4: OLED1.4 R20.2 | length 166.4
  Top Layer w10: OLED1.4 1514,4120 1519,4115 R20.2
NetR1_1: R1.1 sigIN1.1 | length 2724.1
  Top Layer w10: R1.1 3008,4125 3040,4157 3040,4239 v1(3124,4323)
  Bottom Layer w10: v1(3124,4323) 5216,4323 5265,4372 5265,4453 5248,4470 5175,4470 sigIN1.1
NetR2_1: R2.1 sigIN2.1 | length 1518.7
  Top Layer w10: R2.1 3687,4195 3733,4149 3952,4149 3960,4157 3960,4202 3952,4210 3900.71,4210 3900.71,4269 3963,4269 v1(4072,4378)
  Bottom Layer w10: v1(4072,4378) 4723,4378 sigIN2.1
NetR3_1: R3.1 sigIN3.1 | length 1073.2
  Top Layer w10: R3.1 4630.96,4159.96 4800,4329 v1(4800,4536)
  Bottom Layer w10: v1(4800,4536) 4984,4720 sigIN3.1
NetR16_1: R16.1 sigIN4.1 | length 1518
  Top Layer w10: R16.1 4181,4159.96 4181,3980 4160,3959 4128,3959 4111,3976 4111,4434 4233,4556 4233,4605 4299,4671 4691,4671 sigIN4.1
NRST: C18.2 Kres1.1 R19.1 U5.9 | length 4057.9
  Top Layer w10: Kres1.1 2616,3951 2722,3845 R19.1 ; 3498,4160 3695,4160 3975,3880 3975,2714 U5.9 4128,2705 4168,2745 4168,2888 4342.18,3062.18 4342.18,3232.08 4331,3243.26 4331,3328.79 4332.8,3330.58 4332.8,3362.49 4331,3364.28 4331,3380 C18.2
  Bottom Layer w10: Kres1.1 3456,4075 3498,4117 3498,4160
OSC_IN: C16.1 U5.18 Y1.1 | length 3999.4
  Top Layer w10: C16.1 2680,1404 2804,1280 2944,1280 2944,1345 3560,1961 3560,3314 3584,3338 v1(3680,3338)
  Bottom Layer w10: v1(3680,3338) 3786,3338 4025,3577 U5.18 4170,3605 4178.98,3613.98 Y1.1
OSC_OUT: C19.1 U5.19 Y1.2 | length 4350.7
  Top Layer w10: C19.1 2480,1521 2736,1265 3220,1265 3605,1650 v1(3605,3294)
  Bottom Layer w10: v1(3605,3294) 3605,3363.75 3946.25,3705 U5.19 4283.98,3705 Y1.2
P1_4: U5.5
P1_5: U5.6
PD_SCK: HX2.11 U5.27 | length 2867
  Top Layer w10: v1(1880,2305) 1880,2439 1971,2530 HX2.11 ; v1(3356,2214) 3375,2233 3375,3155 U5.27
  Bottom Layer w10: v1(1880,2305) 1881,2305 1972,2214 v1(3356,2214)
PD_SCK1: HX1.11 U5.25 | length 2763
  Top Layer w10: HX1.11 2120,1990 ; v1(3250,2009) 3250,3360 3295,3405 U5.25
  Bottom Layer w10: 2120,1990 2336.5,1990 2345.5,1981 2374.5,1981 2383.5,1990 3231,1990 v1(3250,2009)
PD_SCK2: HX3.11 U5.23 | length 1904.5
  Top Layer w10: HX3.11 2167,3070 2207,3110 v1(2207,3223)
  Bottom Layer w10: v1(2207,3223) 2137,3293 2137,3395 2176,3434 3058,3434 3105,3387 3163,3387 3381,3605 U5.23
PD_SCK3: HX4.11 U5.21 | length 1698
  Top Layer w10: HX4.11 2285,3630 2335,3680 v1(2335,3904)
  Bottom Layer w10: v1(2335,3904) 3393,3904 3425,3872 U5.21
Sigo: R14.2 U2.1 U2.2 | length 705
  Top Layer w10: R14.2 3320,4531 3282,4569 3282,4640 3327,4685 U2.2 U2.1
Sigo1: R13.2 U1.1 U1.2 | length 224.6
  Top Layer w10: R13.2 2908,4680.32 2912.68,4685 U1.2 U1.1
Sigo2: R15.2 U3.1 U3.2 | length 694
  Top Layer w10: U3.1 U3.2 3968,4685 4005,4648 4005,4453 3885.71,4333.71 3885.71,4197.98 3904,4179.68 R15.2
Sigo3: R28.2 U4.1 U4.2 | length 3606.5
  Top Layer w10: R28.2 1175,3928 v1(1200,3953) ; v1(4198,4582) 4198,4614 4279,4695 U4.2 U4.1
  Bottom Layer w10: v1(1200,3953) 1464,3953 1899,4388 4004,4388 v1(4198,4582)
pads on no net: K1. K2. K3. K4. Kres1. R27.2 U1.5 U1.6 U1.7 U2.5 U2.6 U2.7 U3.5 U3.6 U3.7 U4.5 U4.6 U4.7 U5.7 U5.8 U5.12 U5.13 U5.14 U5.15 U5.16 U5.17 U5.29 U5.30 U5.31 U5.32 U5.33 U5.34 U5.35 U5.36 U5.37 U5.38 U5.39 USB1.5 USB1.6
copper on no net:
  other v1: 2255,2290

## Polygon pours and split planes (outlines as drawn)
GND on Bottom Layer "Bottom Layer-GND" (solid, remove dead copper, pour order 16): 1020,4945 1045,4970 5530,4970 5555,4945 5555,2094.42 4510,1049.42 4510,1035 1030,1035 1025,1030 1020,1035 1020,4950 1040,4970 1049.22,4960.78 1049.22,4959.8

## Keep-outs
Keep-Out Layer:
  the board outline again, w10